# Altium PCB Remote.PcbDoc
Units mil, origin at the board's own origin, x right, y up, seen from the top; angles counter-clockwise.
Board outline 2300 x 3725 mil, 2 copper layers (Top Layer, Bottom Layer); 18 components, 19 nets, 80 pads, 3 vias.
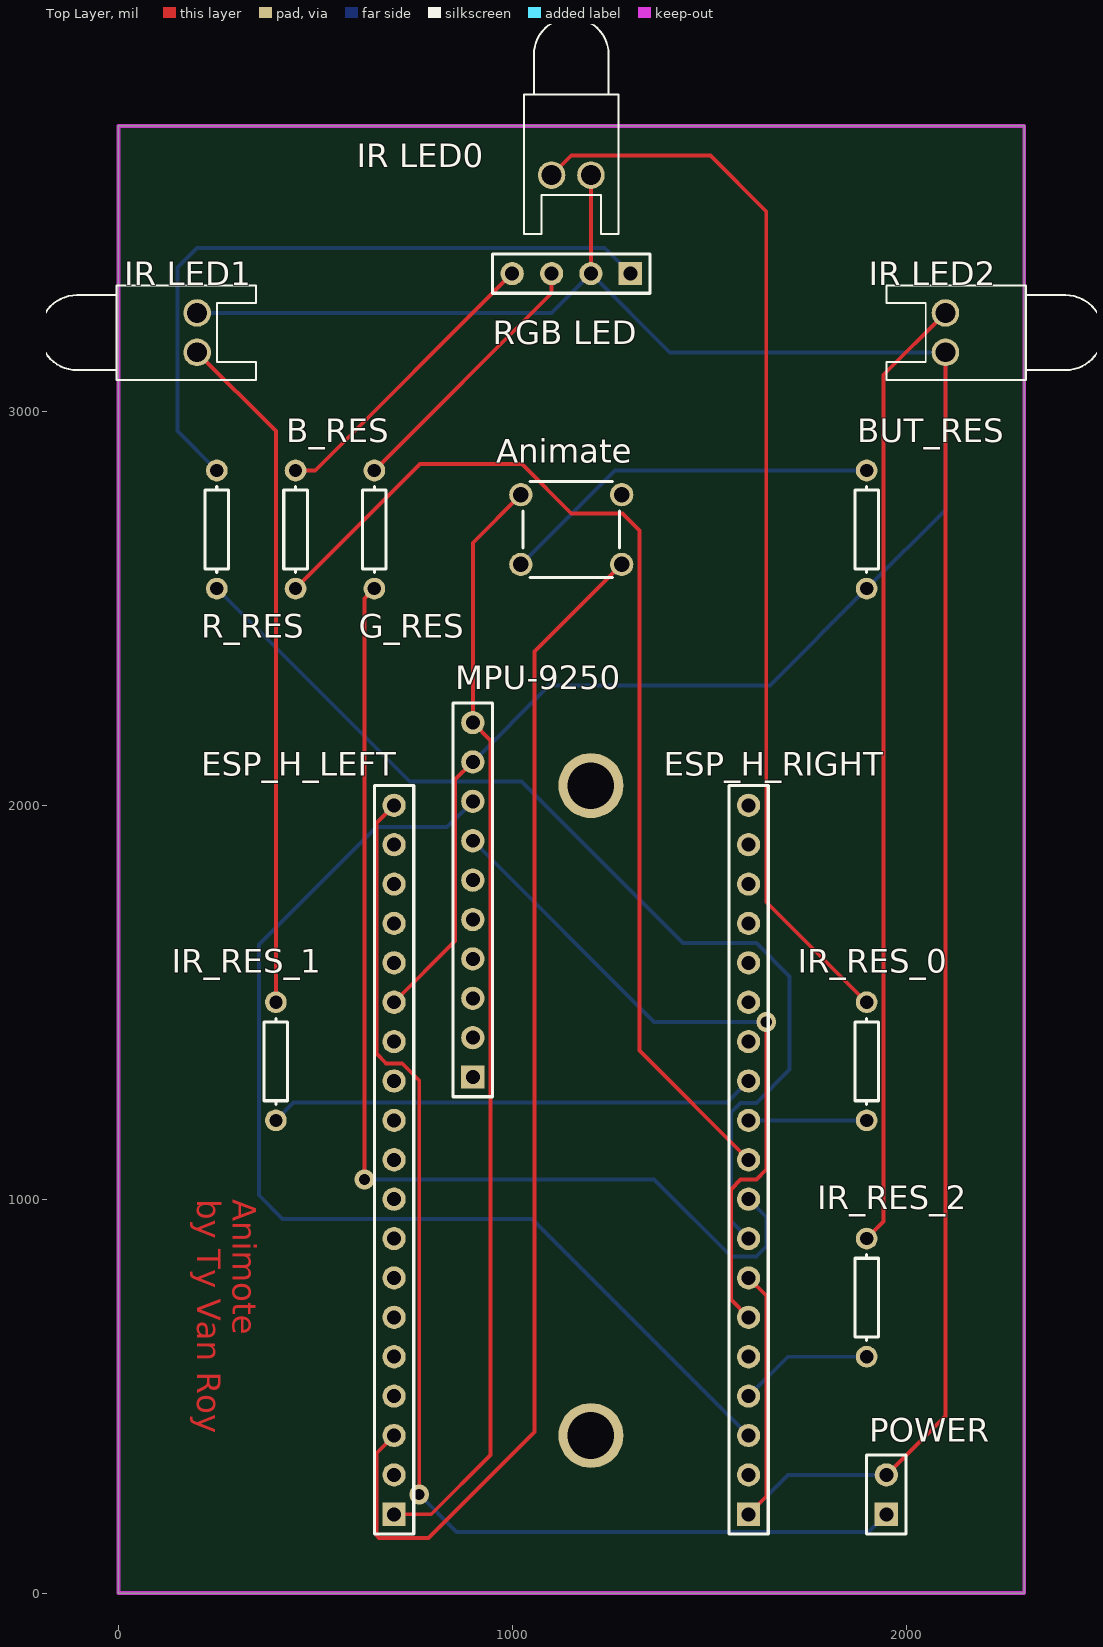
[diagram p0: Top Layer view]
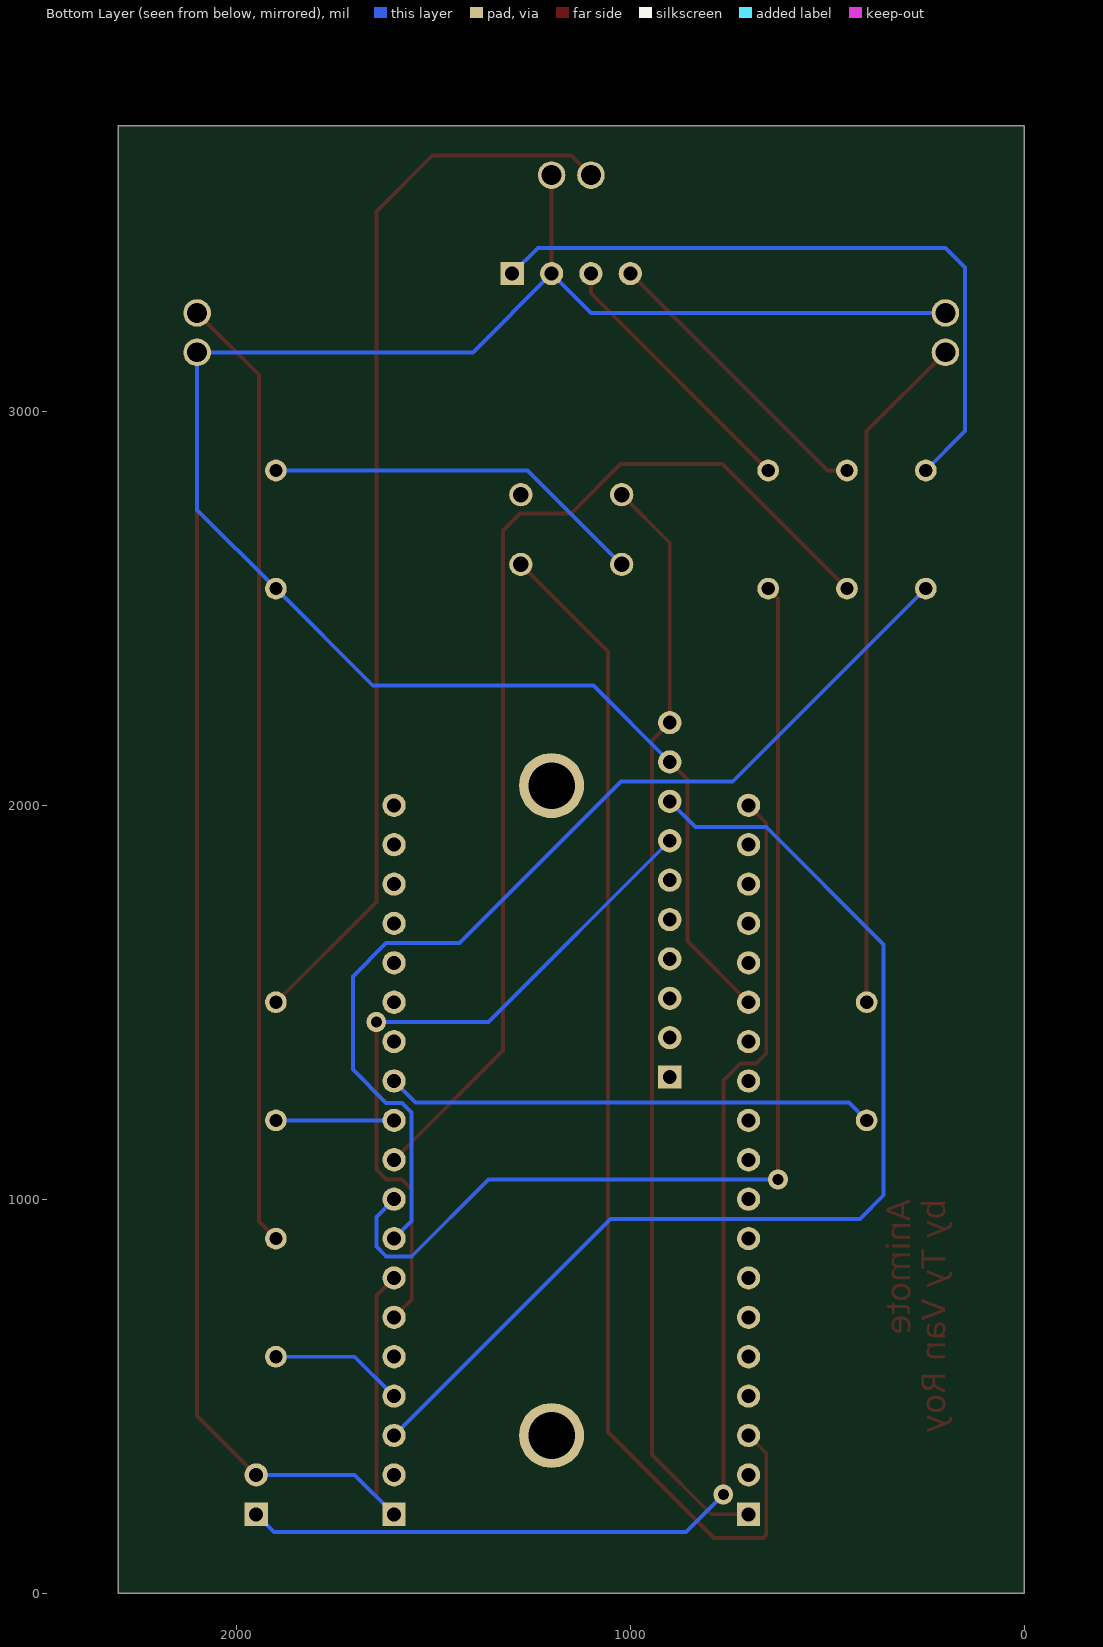
[diagram p1: Bottom Layer view, seen from below]

## Layer stack, top to bottom
Top Solder: solder mask 0.4, Solder Resist, Dk 3.5
Top Layer: signal copper 1.4
Dielectric 1: dielectric 12.6, FR-4, Dk 4.8
Bottom Layer: signal copper 1.4
Bottom Solder: solder mask 0.4, Solder Resist, Dk 3.5

## Board outline
0,0 2300,0 2300,3725 0,3725

## Design rules (kind name [scope] priority, off if disabled: settings)
Clearance [All] p1: gap=10 ignorepadtopadclearanceinfootprint=FALSE except(0: Arc-Hole Track-Hole SMDPad-Hole THPad-Hole Via-Hole Fill-Hole Poly-Hole Region-Hole Text-Hole)
PolygonConnect [All] p1: connectstyle=Relief reliefconductorwidth=10 reliefentries=4 polygonreliefangle="90 Angle" airgapwidth=10
RoutingVias [All] p1: holewidth=28 width=50 viastyle="Through Hole" minholewidth=28 minwidth=50 maxholewidth=28 maxwidth=50
SolderMaskExpansion [All] p1: expansion=4 istentingtop=FALSE
Width [All] p1: maxlimit=10 minlimit=10 preferedwidth=10
30 further rules are at their usual default settings.

## Classes and differential pairs
component class Remote: Animate B_RES BUT_RES ESP_H_LEFT ESP_H_RIGHT G_RES "IR LED0" "IR LED1" "IR LED2" IR_RES_0 IR_RES_1 IR_RES_2 MPU-9250 POWER R_RES "RGB LED"

## Components (designator, comment, footprint, x,y, rotation, side; value= is the part's Value field where it differs from the comment)
Animate "430156043726" 4301x60437x6 1150,2700 r0 top (schematic designator Button)
B_RES "Res1" AXIAL-0.3 450,2700 r90 top value=100
BAT_SCREW1 "Hole 3mm" "Hole 3mm"#1 376.5,2425 r90 top
BAT_SCREW2 "Hole 3mm" "Hole 3mm"#2 -273.5,2425 r90 top
BUT_RES "Res1" AXIAL-0.3 1900,2700 r90 top value=1K
ESP_H_LEFT "Header 19" HDR1X19 700,200 r90 top
ESP_H_RIGHT "Header 19" HDR1X19 1600,200 r90 top
G_RES "Res1" AXIAL-0.3 650,2700 r90 top value=100
"IR LED0" "LED0" LED-0 1150,3600 r180 top
"IR LED1" "LED0" LED-0 200,3200 r270 top
"IR LED2" "LED0" LED-0 2100,3200 r90 top
IR_RES_0 "Res1" AXIAL-0.3 1900,1350 r90 top value=25
IR_RES_1 "Res1" AXIAL-0.3 400,1350 r90 top value=25
IR_RES_2 "Res1" AXIAL-0.3 1900,750 r90 top value=25
MPU-9250 "Header 10" HDR1X10 900,1310 r90 top
POWER "Header 2" HDR1X2 1950,200 r90 top
R_RES "Res1" AXIAL-0.3 250,2700 r90 top value=150
"RGB LED" "Header 4" HDR1X4 1300,3350 r180 top

## Footprints (in the part's own frame and the unit in brackets; to place one, negate y for a bottom-side part, rotate by r counter-clockwise, add the part's x,y. Pads: shape width x height; smd on the part's side, far side on the other; paste and mask are expansions set on the pad)
4301x60437x6 [mm] "6x6mm Tact Switch, THT version"
  round 1.5 hole 1: 1(-3.25,2.25) 2(-3.25,-2.25) 3(3.25,2.25) 4(3.25,-2.25)
  silkscreen extent -3.1,-3.1 3.1,3.1, body extent -3.95,-3.1 3.95,3.1, height 4.35
AXIAL-0.3 [mm] "Axial Device, Thru-Hole; 2 Leads; 0.3 in Pin Spacing"
  round 1.4 hole 0.85: 1(-3.81,0) 2(3.81,0)
  silkscreen extent -2.77,-0.76 2.77,0.76
HDR1X2 [mm] "Connector; Header; 2 Position"
  rect 1.5x1.5 hole 0.9: 1(0,0)
  round 1.5 hole 0.9: 2(2.54,0)
  silkscreen extent -1.27,-1.27 3.81,1.27
HDR1X4 [mm] "Connector; Header; 4 Position"
  rect 1.5x1.5 hole 0.9: 1(0,0)
  round 1.5 hole 0.9: 2(2.54,0) 3(5.08,0) 4(7.62,0)
  silkscreen extent -1.27,-1.27 8.89,1.27
HDR1X10 [mm] "Connector; Header; 10 Position"
  rect 1.5x1.5 hole 0.9: 1(0,0)
  round 1.5 hole 0.9: 2(2.54,0) 3(5.08,0) 4(7.62,0) 5(10.16,0) 6(12.7,0) 7(15.24,0) 8(17.78,0) 9(20.32,0) 10(22.86,0)
  silkscreen extent -1.27,-1.27 24.13,1.27
HDR1X19 [mm] "Connector; Header; 19 Position"
  rect 1.5x1.5 hole 0.9: 1(0,0)
  round 1.5 hole 0.9: 2(2.54,0) 3(5.08,0) 4(7.62,0) 5(10.16,0) 6(12.7,0) 7(15.24,0) 8(17.78,0) 9(20.32,0) 10(22.86,0) 11(25.4,0) 12(27.94,0) 13(30.48,0) 14(33.02,0) 15(35.56,0) 16(38.1,0) 17(40.64,0) 18(43.18,0) 19(45.72,0)
  silkscreen extent -1.27,-1.27 46.99,1.27
"Hole 3mm"#1 [mil]
  round 165 hole 118.11: 1(-375,-823.5)
"Hole 3mm"#2 [mil]
  round 165 hole 118.11: 1(-2025,-1473.5)
LED-0 [mil] "LED; 2 Leads"
  round 70 hole 50: 1(50,0) 2(-50,0)
  silkscreen extent -120,-400 120,150

## Part data
Animate: "WS-TATV THT Tact Switch 6x6mm, height 4.3mm, 260gf", Operating Temperature="-40 to +85degC", Rated Current=50mA, Rated Voltage=12VDC, ComponentLink1Description=Manufacturer, ComponentLink1URL=http://www.we-online.de, ComponentLink2Description=Datasheet, ComponentLink2URL=https://katalog.we-online.com/em/datasheet/430156043726.pdf, Contact Material="Stainless Steel", Contact Plating=Silver, Height=4.3mm, Mounting Technology=THT, Operation Force=260gf, Packaging=Bulk, Part Number=430156043726, Published Date="September 2019", Publisher="Wurth Elektronik", Terminal Material="Copper Alloy", Terminal Plating=Silver, Washable=No
B_RES BUT_RES G_RES IR_RES_0 IR_RES_1 IR_RES_2 R_RES: "Resistor", LatestRevisionDate=17-Jul-2002, LatestRevisionNote="Re-released for DXP Platform.", PackageDescription="Axial Device, Thru-Hole; 2 Leads; 0.3 in Pin Spacing", PackageReference=AXIAL-0.3, Published=8-Jun-2000, Publisher="Altium Limited"
ESP_H_LEFT ESP_H_RIGHT: "Header, 19-Pin", LatestRevisionDate=17-Jul-2002, LatestRevisionNote="Re-released for DXP Platform.", Publisher="Altium Limited"
"IR LED0" "IR LED1" "IR LED2": "Typical INFRARED GaAs LED", LatestRevisionDate=08-Jul-2005, LatestRevisionNote="Mech Layer 1 removed.", PackageDescription="LED; 2 Leads", PackageReference=LED-0, Published=8-Jun-2000, Publisher="Altium Limited"
MPU-9250: "Header, 10-Pin", LatestRevisionDate=17-Jul-2002, LatestRevisionNote="Re-released for DXP Platform.", Publisher="Altium Limited"
POWER: "Header, 2-Pin", LatestRevisionDate=17-Jul-2002, LatestRevisionNote="Re-released for DXP Platform.", Publisher="Altium Limited"
"RGB LED": "Header, 4-Pin", LatestRevisionDate=17-Jul-2002, LatestRevisionNote="Re-released for DXP Platform.", Publisher="Altium Limited"

## Via types
v1: diameter 50, hole 28, Top Layer to Bottom Layer, 3 vias

## Nets (pads, with @x,y where several pads share a name; then routed paths per layer and width w, separated by ;. In a path a pad name is that pad's centre, name@x,y a point inside that pad or via, vN(x,y) a via of type N, cw(c..) or ccw(c..) an arc to the next point about the centre after c; other vN are vias at no path point)
+3.3: Animate.1 ESP_H_LEFT.1 MPU-9250.10 | length 2814.6
  Top Layer w10: ESP_H_LEFT.1 794.53,200 945,350.47 945,2165 MPU-9250.10 900,2666.53 Animate.1
BLED: B_RES.1 ESP_H_RIGHT.10 | length 2786.2
  Top Layer w10: B_RES.1 766,2866 1025,2866 1150,2741 1280,2741 1323,2698 1323,1377 ESP_H_RIGHT.10
BUT_OUT: Animate.4 ESP_H_LEFT.3 | length 3081.8
  Top Layer w10: ESP_H_LEFT.3 655,355 655,147 662,140 787.84,140 1057,409.16 1057,2390.47 Animate.4
GLED: ESP_H_RIGHT.9 G_RES.1 | length 2760.1
  Top Layer w10: v1(625,1050) 625,2525 G_RES.1
  Bottom Layer w10: v1(625,1050) 1360,1050 1555,855 1620,855 1645,880 1645,955 ESP_H_RIGHT.9
GND: "IR LED0.2" "IR LED1.2" "IR LED2.2" "RGB LED.2" BUT_RES.1 ESP_H_LEFT.14 ESP_H_RIGHT.1 ESP_H_RIGHT.7 MPU-9250.9 POWER.2 | length 8773
  Top Layer w10: ESP_H_LEFT.14 855,1655 855,2065 MPU-9250.9 ; 1200,3350 1200,3600 ; ESP_H_RIGHT.1 1645,245 1645,755 ESP_H_RIGHT.7 ; POWER.2 2100,450 2100,3150
  Bottom Layer w10: 200,3250 1100,3250 1200,3350 1400,3150 2100,3150 2100,2750 BUT_RES.1 1654,2304 1094,2304 MPU-9250.9 ; ESP_H_RIGHT.1 1700,300 POWER.2
IRLED_0: ESP_H_RIGHT.11 IR_RES_0.1 | length 300
  Bottom Layer w10: ESP_H_RIGHT.11 IR_RES_0.1
IRLED_1: ESP_H_RIGHT.12 IR_RES_1.1 | length 1241.4
  Bottom Layer w10: IR_RES_1.1 445,1245 1545,1245 ESP_H_RIGHT.12
IRLED_2: ESP_H_RIGHT.4 IR_RES_2.1 | length 341.4
  Bottom Layer w10: ESP_H_RIGHT.4 1700,600 IR_RES_2.1
NetB_RES_2: "RGB LED.4" B_RES.2 | length 757.1
  Top Layer w10: B_RES.2 500,2850 1000,3350
NetBUT_RES_2: Animate.2 BUT_RES.2 | length 976.8
  Bottom Layer w10: Animate.2 1260.63,2850 BUT_RES.2
NetG_RES_2: "RGB LED.3" G_RES.2 | length 686.4
  Top Layer w10: G_RES.2 1100,3300 1100,3350
"NetIR LED0_1": "IR LED0.1" IR_RES_0.2 | length 2738.2
  Top Layer w10: 1100,3600 1150,3650 1503,3650 1645,3508 1645,1755 IR_RES_0.2
"NetIR LED1_1": "IR LED1.1" IR_RES_1.2 | length 1732.8
  Top Layer w10: 200,3150 400,2950 IR_RES_1.2
"NetIR LED2_1": "IR LED2.1" IR_RES_2.2 | length 2432.8
  Top Layer w10: IR_RES_2.2 1943,943 1943,3093 2100,3250
NetR_RES_2: "RGB LED.1" R_RES.2 | length 1754.1
  Bottom Layer w10: R_RES.2 150,2950 150,3365 200,3415 1235,3415 1300,3350
RLED: ESP_H_RIGHT.8 R_RES.1 | length 2631.4
  Bottom Layer w10: R_RES.1 740,2060 1024,2060 1434,1650 1620,1650 1704.53,1565.47 1704.53,1329.06 1620,1244.53 1580,1244.53 1555.47,1220 1555.47,944.53 ESP_H_RIGHT.8
SCL: ESP_H_RIGHT.3 MPU-9250.8 | length 2826
  Bottom Layer w10: MPU-9250.8 835,1945 655,1945 357,1647 357,1010 417,950 1050,950 ESP_H_RIGHT.3
SDA: ESP_H_RIGHT.6 MPU-9250.7 | length 1764.9
  Top Layer w10: ESP_H_RIGHT.6 1555,745 1555,1025 1580,1050 1620,1050 1645,1075 v1(1645,1450)
  Bottom Layer w10: MPU-9250.7 1360,1450 v1(1645,1450)
VCC: ESP_H_LEFT.19 POWER.1 | length 3081.2
  Top Layer w10: ESP_H_LEFT.19 655,1955 655,1370 680,1345 720,1345 764,1301 v1(764,250)
  Bottom Layer w10: v1(764,250) 859,155 1905,155 POWER.1
pads on no net: Animate.3 BAT_SCREW1.1 BAT_SCREW2.1 ESP_H_LEFT.2 ESP_H_LEFT.4 ESP_H_LEFT.5 ESP_H_LEFT.6 ESP_H_LEFT.7 ESP_H_LEFT.8 ESP_H_LEFT.9 ESP_H_LEFT.10 ESP_H_LEFT.11 ESP_H_LEFT.12 ESP_H_LEFT.13 ESP_H_LEFT.15 ESP_H_LEFT.16 ESP_H_LEFT.17 ESP_H_LEFT.18 ESP_H_RIGHT.2 ESP_H_RIGHT.5 ESP_H_RIGHT.13 ESP_H_RIGHT.14 ESP_H_RIGHT.15 ESP_H_RIGHT.16 ESP_H_RIGHT.17 ESP_H_RIGHT.18 ESP_H_RIGHT.19 MPU-9250.1 MPU-9250.2 MPU-9250.3 MPU-9250.4 MPU-9250.5 MPU-9250.6

## Keep-outs
Top Layer:
  the board outline again, w10

## Other copper
Top Layer:
  text "Animote / by Ty Van Roy" at 200,1000 h60 r270